# Altium PCB ART-Pi_STM32H750_COPY.PcbDoc (part 2 of 2)
Units mil, origin at the board's own origin, x right, y up, seen from the top; angles counter-clockwise.
Board outline 3346.46 x 2204.72 mil, 4 copper layers (Top Layer, VCC, GND, Bottom Layer), stack 30.634 mil thick; 187 components, 307 nets, 1023 pads, 107 vias.
Unrouted connection lines stored in the file: 478.
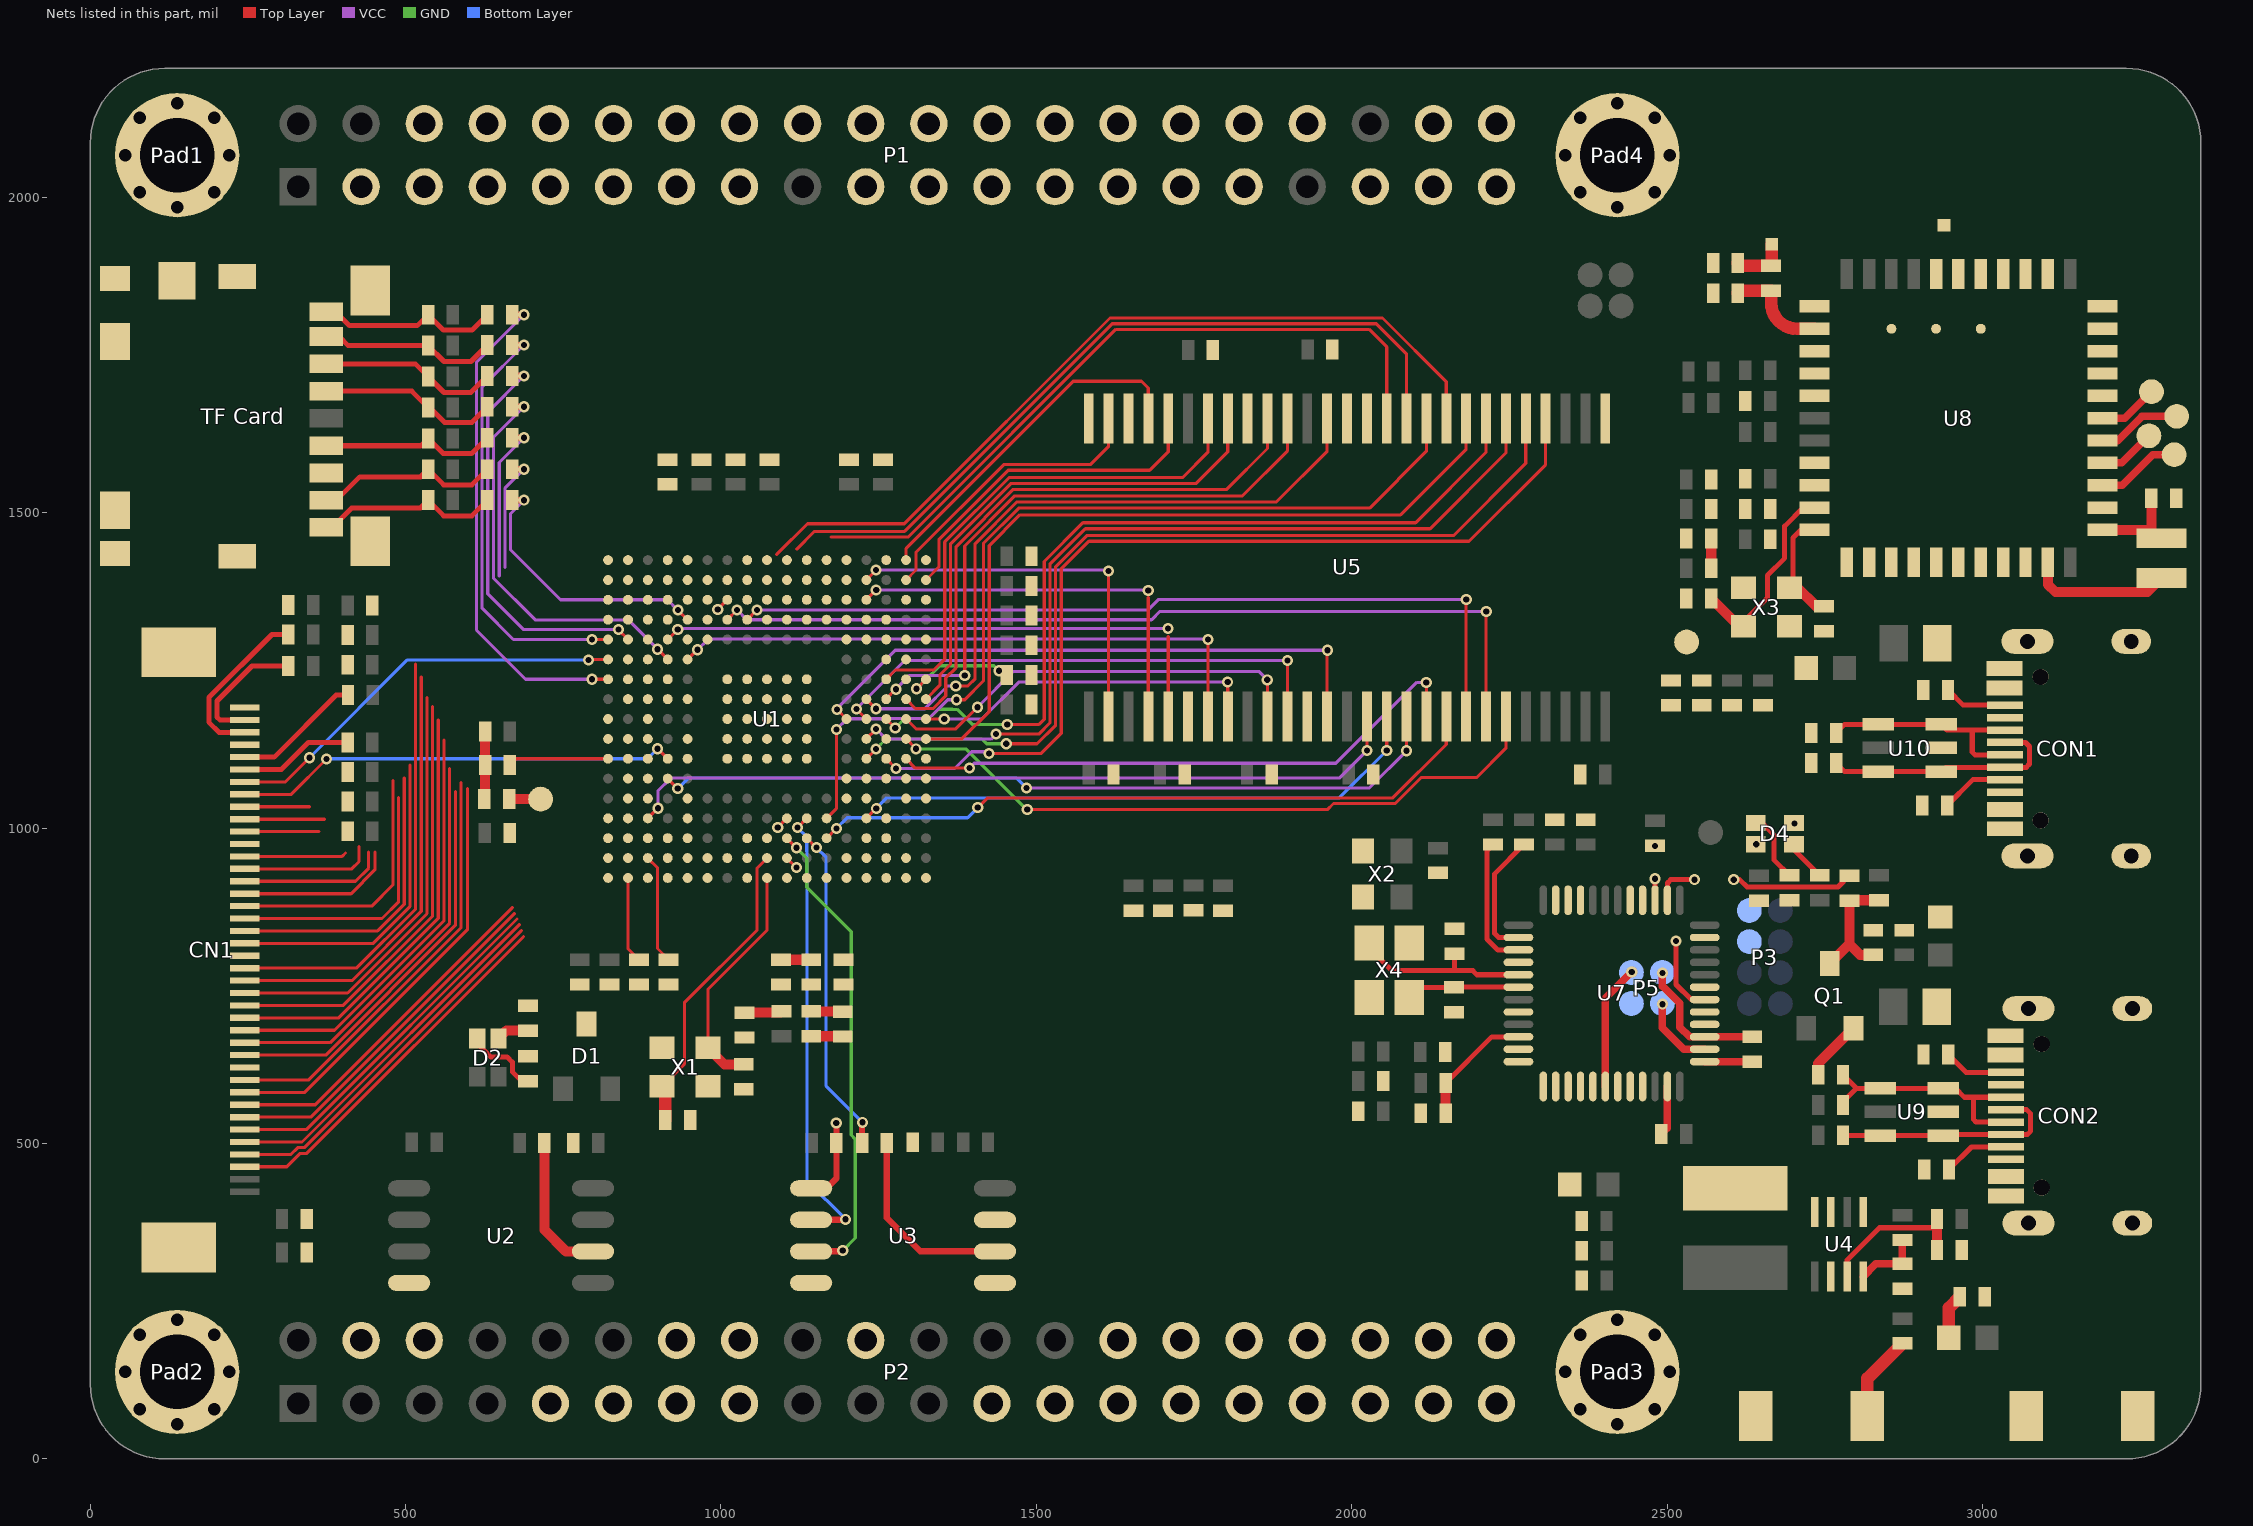
[diagram p4: the nets of this part, all layers, seen from the top]

## Via types
v1: diameter 17.72, hole 9.84, Top Layer to Bottom Layer, tented both sides, 107 vias

## Nets (pads, with @x,y where several pads share a name; then routed paths per layer and width w, separated by ;. In a path a pad name is that pad's centre, name@x,y a point inside that pad or via, vN(x,y) a via of type N, cw(c..) or ccw(c..) an arc to the next point about the centre after c; other vN are vias at no path point) (continued)
FMC_A6: U1.R7 U5.31 | length 1479.7
  Top Layer w5: U1.R7@1261.98,1110 v1(1277.4,1094.6) ; v1(1424.9,1118.1) 1507.21,1118.1 1539.5,1150.39 1539.5,1410.94 1583.36,1454.8 2186,1454.8 2307.45,1576.25 U5.31@2307.45,1649.44
  VCC w5: v1(1277.4,1094.6) 1370.7,1094.6 1397.26,1121.16 1421.84,1121.16 v1(1424.9,1118.1)
FMC_A7: U1.P7 U5.32 | length 1464.3
  Top Layer w5: U1.P7@1230.49,1110 1245.9,1125.41 v1(1245.9,1125.6) ; v1(1452.4,1133.7) 1501.08,1133.7 1530.5,1163.12 1530.5,1414.67 1579.63,1463.8 2161.4,1463.8 2275.95,1578.35 U5.32@2275.95,1649.44
  GND w5: v1(1245.9,1125.6) 1261.6,1141.3 1413.6,1141.3 1421.2,1133.7 v1(1452.4,1133.7)
FMC_A8: U1.P8 U5.33 | length 1417.2
  Top Layer w5: U1.P8@1230.49,1141.5 1245.9,1156.91 v1(1245.9,1157.2) ; v1(1436.1,1149.1) 1503.76,1149.1 1521.4,1166.74 1521.4,1418.3 1577.7,1474.6 2124.4,1474.6 2244.46,1594.66 U5.33@2244.46,1649.44
  VCC w5: v1(1245.9,1157.2) 1261.9,1141.2 1428.2,1141.2 v1(1436.1,1149.1)
FMC_A9: U1.R9 U5.34 | length 1360
  Top Layer w5: U1.R9@1261.98,1172.99 v1(1276.28,1158.7) v1@1276.48,1158.5 ; v1(1453.8,1164.5) 1504.3,1164.5 1512.4,1172.6 1512.4,1422.7 1573.8,1484.1 2101.4,1484.1 2212.96,1595.66 U5.34@2212.96,1649.44
  VCC w5: v1(1276.28,1158.7) v1@1277.53,1157.44
  GND w5: v1(1276.28,1158.7) 1291.48,1173.9 1330.4,1173.9 1344.85,1188.35 1367.03,1188.35 1367.14,1188.24 1374.36,1188.24 1398.1,1164.5 v1(1453.8,1164.5)
FMC_A10: U1.T8 U5.22 | length 1088.2
  Top Layer w5: U1.T8@1293.48,1141.5 v1(1309.3,1125.7) ; v1(1485.5,1029.3) 1961.34,1029.3 1971.04,1039 2069.03,1039 2110.33,1080.3 2198.2,1080.3 2244.46,1126.56 U5.22@2244.46,1177
  GND w5: v1(1309.3,1125.7) 1388.2,1125.7 1484.6,1029.3 v1(1485.5,1029.3)
FMC_A11: U1.U8 U5.35 | length 1249.7
  Top Layer w5: U1.U8@1324.98,1141.5 1381.9,1141.5 1425.2,1184.8 1425.2,1447.9 1473.9,1496.6 2077.6,1496.6 2181.47,1600.47 U5.35@2181.47,1649.44
FMC_A12: U1.H16 U5.36 | length 1316.9
  Top Layer w5: 1088.5,1434 1137.1,1482.6 1290.47,1482.6 1616.67,1808.8 2048.9,1808.8 2149.97,1707.73 U5.36@2149.97,1649.44
FMC_BA0: U1.H14 U5.20 | length 1339.1
  Top Layer w5: U1.H14@1041.51,1330.47 v1(1057.04,1346) ; U5.20@2181.47,1177 v1@2181.47,1362.6
  VCC w5: v1(1057.04,1346) 1677.2,1346 1693.8,1362.6 v1(2181.7,1362.6)
FMC_BA1: U1.G14 U5.21 | length 1388.2
  Top Layer w5: U1.G14@1010.02,1330.47 1010.02,1330.62 1025.3,1345.9 v1(1025.5,1345.9) ; U5.21@2212.96,1177 v1@2212.96,1343.6
  VCC w5: v1(1025.5,1345.9) 1041.1,1330.3 1682.7,1330.3 1696,1343.6 v1(2213.2,1343.6)
FMC_D0: U1.P16 U5.2 | length 624.4
  Top Layer w5: U1.P16@1230.49,1393.46 1230.49,1393.31 1245.6,1408.42 v1(1245.6,1409.2) ; U5.2@1614.54,1177 U5.2@1614.6,1177.06 1615.8,1178.26 1614.6,1179.46 v1(1614.6,1407.8)
  VCC w5: v1(1245.6,1409.2) 1614.4,1409.2 1614.6,1409 v1(1614.6,1407.8)
FMC_D1: U1.P15 U5.4 | length 642.8
  Top Layer w5: U1.P15@1230.49,1361.97 1230.49,1362.19 v1(1246,1377.7) ; U5.4@1677.53,1177 1677.53,1365.9
  VCC w5: v1(1246,1377.7) 1676.2,1377.7 v1(1677.3,1376.6)
FMC_D2: U1.D13 U5.5 | length 927
  Top Layer w5: U1.D13@915.53,1298.98 v1(931.5,1314.95) ; U5.5@1709.02,1177 1709.02,1303.6
  VCC w5: v1(931.5,1314.95) 933.15,1316.6 v1(1708.6,1316.6)
FMC_D3: U1.E12 U5.7 | length 960.6
  Top Layer w5: U1.E12@947.02,1267.48 962.34,1282.8 v1(962.8,1282.8) ; U5.7@1772.02,1177 v1(1772,1299)
  VCC w5: v1(962.8,1282.8) 979.7,1299.7 1771.3,1299.7 v1(1772,1299)
FMC_D4: U1.U9 U5.8 | length 559.2
  Top Layer w5: U1.U9@1324.98,1172.99 v1(1353.89,1172.99) ; U5.8@1803.51,1177 1803.51,1231.5 v1@1803.51,1233.6
  VCC w5: v1(1353.89,1172.99) 1413.49,1172.99 1472,1231.5 v1(1803.3,1231.5)
FMC_D5: U1.T9 U5.10 | length 680.6
  Top Layer w5: U1.T9@1293.48,1172.99 1309.17,1157.3 1372.3,1157.3 v1(1406.6,1191.6) ; U5.10@1866.5,1177 v1@1866.5,1235.1
  VCC w5: v1(1406.6,1191.6) 1463.5,1248.5 1852.8,1248.5 v1(1866.2,1235.1)
FMC_D6: U1.P9 U5.11 | length 827.4
  Top Layer w5: v1(1214.7,1188.8) U1.P9@1230.49,1172.99 U1.P9@1230.49,1174.11 ; U5.11@1898,1177 v1@1898,1265.7
  VCC w5: v1(1214.7,1188.8) 1291.6,1265.7 v1(1898.1,1265.7)
FMC_D7: U1.N9 U5.13 | length 943.5
  Top Layer w5: v1(1184.08,1187.9) U1.N9@1198.99,1172.99 ; U5.13@1960.99,1177 v1@1960.99,1282
  VCC w5: v1(1184.08,1187.9) 1184.08,1189.88 1276.2,1282 v1(1961.4,1282)
FMC_D8: U1.P10 U5.42 | length 1083.2
  Top Layer w5: U1.P10@1230.49,1204.49 v1(1245.6,1189.38) ; v1(1372.2,1225.4) 1391.42,1225.4 1402.9,1236.88 1402.9,1451.06 1468.84,1517 1880.4,1517 1960.99,1597.59 U5.42@1960.99,1649.44
  VCC w5: v1(1245.6,1189.38) 1323.08,1189.38 1359.1,1225.4 v1(1372.2,1225.4)
FMC_D9: U1.R10 U5.44 | length 971.3
  Top Layer w5: U1.R10@1261.98,1204.49 1261.98,1205.38 1276.7,1220.1 v1(1277.3,1220.1) ; v1(1386.4,1242.1) 1386.4,1447.29 1465.81,1526.7 1826.9,1526.7 1898,1597.8 U5.44@1898,1649.44
  VCC w5: v1(1277.3,1220.1) 1299.3,1242.1 v1(1386.4,1242.1)
FMC_D10: U1.T10 U5.45 | length 926.6
  Top Layer w5: U1.T10@1293.48,1204.49 1308.27,1189.7 1336.5,1189.7 1356.4,1209.6 1356.4,1238.2 1372.7,1254.5 1372.7,1446.32 1463.48,1537.1 1801.8,1537.1 1866.5,1601.8 U5.45@1866.5,1649.44
FMC_D11: U1.U10 U5.47 | length 815
  Top Layer w5: U1.U10@1324.98,1204.49 1347.1,1226.61 1347.1,1242.8 1363.7,1259.4 1363.7,1450.04 1460.16,1546.5 1753.53,1546.5 1803.51,1596.48 U5.47@1803.51,1649.44
FMC_D12: U1.R11 U5.48 | length 821.5
  Top Layer w5: U1.R11@1261.98,1235.98 1276.7,1250.7 1337.5,1250.7 1354.7,1267.9 1354.7,1453.77 1456.83,1555.9 1732,1555.9 1772.02,1595.92 U5.48@1772.02,1649.44
FMC_D13: U1.U16 U5.50 | length 546.3
  Top Layer w5: U1.U16@1324.98,1393.46 1345.5,1413.99 1345.5,1457.3 1455.5,1567.3 1679.6,1567.3 1709.02,1596.72 U5.50@1709.02,1649.44
FMC_D14: U1.T17 U5.51 | length 565.1
  Top Layer w5: U1.T17@1293.48,1424.96 1293.48,1443.48 1558.5,1708.5 1666.8,1708.5 1677.53,1697.77 U5.51@1677.53,1649.44
FMC_D15: U1.T16 U5.53 | length 469.4
  Top Layer w5: U1.T16@1293.48,1393.46 1309.2,1409.18 1309.2,1437.3 1448.2,1576.3 1585.6,1576.3 1614.54,1605.24 U5.53@1614.54,1649.44
FMC_NBL0: U1.C4 U5.15 | length 1254.8
  Top Layer w5: U1.C4@884.03,1015.51 v1(899.9,1031.4) ; v1(2024.05,1122.9) U5.15@2024.05,1177.06
  VCC w5: v1(899.9,1031.4) 899.9,1058.9 920.24,1079.24 1980.39,1079.24 v1(2024.05,1122.9)
FMC_NBL1: U1.B4 U5.39 | length 1142.3
  Top Layer w5: 1174.6,1461.5 1296.8,1461.5 1626.1,1790.8 2027.6,1790.8 2055.48,1762.92 U5.39@2055.48,1649.44
FMC_SDCKE0: U1.M4 U5.37 | length 1445.4
  Top Layer w5: U1.M4@1167.5,1015.51 1182.9,1030.92 v1(1182.9,1156.4) ; v1(1373.5,1203.6) 1386.4,1203.6 1416.2,1233.4 1416.2,1451.63 1471.87,1507.3 2028.4,1507.3 2118.47,1597.37 U5.37@2118.47,1649.44
  VCC w5: v1(1182.9,1156.4) 1199.94,1173.44 1269.3,1173.44 1269.91,1174.06 1329.86,1174.06 1359.4,1203.6 v1(1373.5,1203.6)
FMC_SDCLK: U1.F15 U5.38 | length 1237.1
  Top Layer w5: 1120.1,1442.4 1148.2,1470.5 1291.1,1470.5 1620.4,1799.8 2038.8,1799.8 2086.98,1751.62 U5.38@2086.98,1649.44
FMC_SDNCAS: U1.D6 U5.17 | length 1270.3
  Top Layer w5: U1.D6@915.53,1078.5 v1(931.43,1062.6) ; U5.17@2087.04,1177.06 2087.04,1122.76 v1(2087.1,1122.7)
  VCC w5: v1(1484.2,1063.8) 2028.2,1063.8 v1(2087.1,1122.7)
  Bottom Layer w5: v1(931.43,1062.6) 948.13,1079.3 948.19,1079.24 1468.76,1079.24 v1(1484.2,1063.8)
FMC_SDNE0: U1.M3 U5.19 | length 1088.4
  Top Layer w5: U1.M3@1167.5,984.02 1182.78,999.3 v1(1182.9,999.3) ; v1(1407.2,1032.5) 1422.7,1048 2065.3,1048 2149.97,1132.67 U5.19@2149.97,1177
  Bottom Layer w5: v1(1182.9,999.3) 1200,1016.4 1391.1,1016.4 v1(1407.2,1032.5)
FMC_SDNRAS: U1.T7 U5.18 | length 941.3
  Top Layer w5: U1.T7@1293.48,1110 1308.28,1095.2 v1(1394.1,1095.2) ; U5.18@2118.47,1177 v1@2118.47,1231.1
  VCC w5: v1(1394.1,1095.2) 1401.64,1102.74 1974.94,1102.74 2103.3,1231.1 v1(2118.3,1231.1)
FMC_SDNWE: U1.P4 U5.16 | length 923.5
  Top Layer w5: U1.P4@1230.49,1015.51 v1(1246.3,1031.32) ; v1(2055.48,1123.02) U5.16@2055.48,1177
  Bottom Layer w5: v1(1246.3,1031.32) 1262.88,1047.9 1980.36,1047.9 v1(2055.48,1123.02)
GND: "TF Card.6" "TF Card.10" "TF Card.11" "TF Card.12" "TF Card.13" "TF Card.14" "TF Card.15" "TF Card.16" "TF Card.17" "TF Card.18" C1.1 C2.1 C4.1 C5.1 C6.1 C7.1 C8.1 C9.1 C10.1 C11.1 C12.2 C13.1 C14.1 C15.1 C16.1 C17.1 C18.1 C19.1 C20.1 C21.1 C22.1 C23.1 C24.1 C25.1 C26.1 C27.1 C28.1 C29.1 C30.1 C31.1 C32.1 C33.1 C34.1 C35.1 C36.1 C37.1 C38.1 C39.1 C40.1 C41.1 C42.1 C43.1 C44.1 C45.2 C46.2 C48.2 C49.1 C50.2 C52.1 C53.1 C54.1 C55.1 C56.1 C57.1 C58.1 C59.1 C60.1 C68.2 C69.2 C70.2 C71.1 C72.1 C73.2 C74.1 C75.2 C77.1 C78.1 C79.1 CN1.11 CN1.20 CN1.29 CN1.A CN1.B CON1.0 CON1.A1 CON1.A12 CON1.B1 CON1.B12 CON2.0 CON2.A1 CON2.A12 CON2.B1 CON2.B12 K1.2 K2.2 P1.6 P1.9 P1.14 P1.20 P1.25 P1.30 P1.34 P1.39 P2.6 P2.9 P2.14 P2.20 P2.25 P2.30 P2.34 P2.39 P3.8 P5.4 R7.1 R12.2 R13.2 R16.2 R17.2 R19.1 R24.2 R28.2 R38.2 R43.2 R48.1 R63.1 RF1.0 U1.A1 U1.A17 U1.B2 U1.B6 U1.C10 U1.C13 U1.C16 U1.F2 U1.G7 U1.G8 U1.G9 U1.G10 U1.G11 U1.G16 U1.H7 U1.H8 U1.H9 U1.H10 U1.H11 U1.J3 U1.J7 U1.J8 U1.J9 U1.J10 U1.J11 U1.J16 U1.J17 U1.K7 U1.K8 U1.K9 U1.K10 U1.K11 U1.K15 U1.L7 U1.L8 U1.L9 U1.L10 U1.L11 U1.L15 U1.M15 U1.N1 U1.N16 U1.P1 U1.R4 U1.R8 U1.T12 U1.U1 U1.U17 U2.4 U3.4 U4.4 U4.6 U5.6 U5.12 U5.28 U5.41 U5.46 U5.52 U5.54 U7.8 U7.20 U7.23 U7.35 U7.47 U8.1 U8.3 U8.20 U8.31 U8.33 U8.36 U9.5 U10.5 X1.2 X1.4 X2.4 X3.2 X3.4 X4.2 X4.4 | length 237.1
  Top Layer w12: C77.1@2491,515 2500.58,524.58 U7.23@2500.58,590.36
  Top Layer w16: R19.1@624.63,1046 626,1047.37 C36.1@626,1100 C13.1@626,1153 ; C41.1@1143,670 1192.63,670 C42.1@1193,669.63
GPIO_CARD_DETECT: R80.2 U1.A11 | length 791
  Top Layer w5: v1(795.6,1236.1) 795.72,1235.98 U1.A11@821.04,1235.98
  Top Layer w10: R80.2@669,1814 v1(687.7,1814)
  VCC w5: v1(687.7,1814) 612.3,1738.6 612.3,1313.9 690.1,1236.1 v1(795.6,1236.1)
GPIO_LCD_BL: CN1.34 U1.A12 | length 656.5
  Top Layer w5: CN1.34@245,1073.22 309.22,1073.22 v1(347.5,1111.5) ; v1(789.7,1266.7) 790.48,1267.48 U1.A12@821.04,1267.48
  Bottom Layer w5: v1(347.5,1111.5) 502.7,1266.7 v1(789.7,1266.7)
GPIO_LED_B: R21.2 U1.E4
GPIO_LED_R: R22.2 U1.C1
GPIO_PA6: P2.23 U1.R3
GPIO_PA15: P1.11 U1.A14
GPIO_PB0: P2.38 U1.U5
GPIO_PB1: P2.37 U1.T5
GPIO_PB2: P2.40 U1.R6
GPIO_PC6: P1.22 U1.F14
GPIO_PC7: P1.18 U1.F13
GPIO_PD13: P1.27 U1.R17
GPIO_PE2: P2.32 U1.C3
GPIO_PE4: P2.29 U1.D2
GPIO_PE5: P2.31 U1.D1
GPIO_PE6: P2.33 U1.E5
GPIO_PG7: P1.26 U1.F16
GPIO_PH2: P2.35 U1.N2
GPIO_PH3: P2.36 U1.P2
GPIO_PH7: P1.29 U1.U13
GPIO_PH8: P1.28 U1.T13
GPIO_PH9: P1.31 U1.R13
GPIO_PH10: P1.32 U1.P13
GPIO_PH11: P1.15 U1.D16
GPIO_PH12: P1.16 U1.B17
GPIO_PH15: P1.13 U1.B16
GPIO_TS_IIC_INT: U1.C9
GPIO_TS_RST: U1.B12
GPIO_USER_KEY1: K2.1 R23.1 U1.P3 | length 138
  Top Layer w20: K2.1@2817.59,68 2817.59,127.59 R23.1@2873,183
GPIO_WIFI_HOST_WAKE: U1.D3 U8.13
GPIO_WIFI_REG_ON: U1.E3 U8.12
I2C1_SCL: U1.B5
I2C1_SDA: U1.C5
I2C4_SCL: P1.3 R85.2 U1.P14
I2C4_SDA: P1.5 R84.2 U1.R14
LCD_B0: CN1.21 U1.D11 | length 510.1
  Top Layer w5: CN1.21@245,817.32 448.56,817.32 506.8,875.55 506.8,1099.7
LCD_B1: CN1.22 U1.E10 | length 470.5
  Top Layer w5: CN1.22@245,837 455.52,837 497.8,879.28 497.8,1079.5
LCD_B2: CN1.23 U1.D10 | length 420.1
  Top Layer w5: CN1.23@245,856.69 462.48,856.69 488.8,883.01 488.8,1048.4
LCD_B3: CN1.24 U1.B10 | length 414
  Top Layer w5: CN1.24@245,876.37 446.27,876.37 479.8,909.9 479.8,1075.2
LCD_B4: CN1.25 U1.C8 | length 250.1
  Top Layer w5: CN1.25@245,896.06 413.56,896.06 451.2,933.7 451.2,962
LCD_B5: CN1.26 U1.B8 | length 230.4
  Top Layer w5: CN1.26@245,915.74 420.51,915.74 441.3,936.53 441.3,962
LCD_B6: CN1.27 U1.A8 | length 210
  Top Layer w5: CN1.27@245,935.43 414.63,935.43 426,946.8 426,971.1
LCD_B7: CN1.28 U1.C7 | length 161.8
  Top Layer w5: CN1.28@245,955.11 399.21,955.11 404.6,960.5
LCD_CLK: CN1.30 U1.H3 | length 117.3
  Top Layer w5: CN1.30@245,994.48 362.28,994.48
LCD_DE: CN1.33 U1.D7 | length 707
  Top Layer w5: CN1.33@245,1053.54 318.54,1053.54 v1(374.6,1109.6) ; v1(899.4,1125.8) 899.73,1125.8 U1.D7@915.53,1110
  Bottom Layer w5: v1(374.6,1109.6) 374.9,1109.9 883.5,1109.9 v1(899.4,1125.8)
LCD_G0: CN1.12 U1.N14 | length 631
  Top Layer w5: CN1.12@245,640.15 373.22,640.15 578.8,845.73 578.8,1057.8
LCD_G1: CN1.13 U1.N13 | length 648.5
  Top Layer w5: CN1.13@245,659.83 380.18,659.83 569.8,849.46 569.8,1094.6
LCD_G2: CN1.14 U1.M14 | length 673.9
  Top Layer w5: CN1.14@245,679.52 387.14,679.52 560.8,853.18 560.8,1139.3
LCD_G3: CN1.15 U1.L14 | length 686.2
  Top Layer w5: CN1.15@245,699.2 394.09,699.2 551.8,856.91 551.8,1171
LCD_G4: CN1.16 U1.K14 | length 688.2
  Top Layer w5: CN1.16@245,718.89 401.05,718.89 542.8,860.64 542.8,1192.37
LCD_G5: CN1.17 U1.J14 | length 683.2
  Top Layer w5: CN1.17@245,738.57 408.01,738.57 533.8,864.37 533.8,1206.7
LCD_G6: CN1.18 U1.J15 | length 696.9
  Top Layer w5: CN1.18@245,758.26 414.96,758.26 524.8,868.1 524.8,1239.7
LCD_G7: CN1.19 U1.H17 | length 698
  Top Layer w5: CN1.19@245,777.94 421.92,777.94 515.8,871.82 515.8,1260.1
LCD_HSYNC: CN1.31 U1.H1 | length 126.3
  Top Layer w5: CN1.31@245,1014.17 371.27,1014.17
LCD_R0: CN1.3 U1.P5 | length 593
  Top Layer w5: CN1.3@245,462.98 311.48,462.98 332.85,484.35 343.19,484.35 686.84,828
LCD_R1: CN1.4 U1.N6 | length 585.4
  Top Layer w5: CN1.4@245,482.67 318.17,482.67 328.85,493.35 339.47,493.35 683.51,837.4
LCD_R2: CN1.5 U1.P6 | length 577.9
  Top Layer w5: CN1.5@245,502.35 335.74,502.35 680.18,846.8
LCD_R3: CN1.6 U1.T6 | length 569.8
  Top Layer w5: CN1.6@245,522.04 342.7,522.04 676.56,855.9
LCD_R4: CN1.7 U1.U6 | length 561.7
  Top Layer w5: CN1.7@245,541.72 349.65,541.72 672.83,864.9
LCD_R5: CN1.8 U1.U7 | length 553.5
  Top Layer w5: CN1.8@245,561.41 356.61,561.41 669.1,873.9
LCD_R6: CN1.9 U1.R12 | length 683.2
  Top Layer w5: CN1.9@245,581.09 340.29,581.09 597.9,838.7 597.9,1062.3
LCD_R7: CN1.10 U1.N15 | length 673
  Top Layer w5: CN1.10@245,600.78 346.58,600.78 587.8,842 587.8,1072.3
LCD_VSYNC: CN1.32 U1.H2 | length 102.2
  Top Layer w5: CN1.32@245,1033.85 347.25,1033.85
LED_STLINK: D4.2 D4.4 U7.30 | length 124.4
  Top Layer w8: v1(2514.2,821.2) 2514.2,752.2 2538.24,728.16 U7.30@2559.64,728.16
  other v1: 2641.3,974.3 2702.1,1007.5
NetC12_1: C12.1 R5.1 U4.8 | length 108.3
  Top Layer w12: U4.8@2811,289 2831,309 C12.1@2873,309 R5.1@2873,347
NetC35_2: C35.2 D1.3 U1.B1 | length 136.9
  Top Layer w5: U1.B1@852.54,921.02 852.54,808.83 C35.2@870,791.37
NetC36_2: C36.2 U1.A7 | length 159.8
  Top Layer w5: C36.2@665.37,1100 675.37,1110 U1.A7@821.04,1110
NetC37_2: C37.2 U1.D17
NetC38_2: C38.2 U1.U11 | length 184.9
  Top Layer w5: v1(1310.2,1221.1) 1310.2,1221.21 U1.U11@1324.98,1235.98 ; v1(1440.6,1249.5) 1446.5,1249.5 C38.2@1453,1243
  GND w5: v1(1310.2,1221.1) 1346.56,1257.46 1432.64,1257.46 v1(1440.6,1249.5)
NetC45_1: C45.1 C61.2 U8.2 | length 237.1
  Top Layer w20: U8.2@2733.65,1791.73 2706.18,1791.73 ; C45.1@2616.37,1852 ccw(c2616.37,1848) C45.1@2612.37,1848 cw(c2616.37,1848) C45.1@2616.37,1852 ; C45.1@2616.37,1852 C61.2@2665,1852 2665,1832.92 ; 2665,1832.92 ccw(c2706.18,1832.92) 2706.18,1791.73 ; 2665,1832.92 ccw(c2706.18,1832.92) 2706.18,1791.73
NetC46_1: C46.1 C61.1 RF1.1 | length 99.3
  Top Layer w16: C61.1@2665,1891.37 ccw(c2665,1892.37) 2666,1892.37 cw(c2665,1892.37) C61.1@2665,1891.37
  Top Layer w20: C61.1@2665,1891.37 C46.1@2617,1891.37 ; C61.1@2666,1892.37 RF1.1@2666,1926 ; C46.1@2617,1891.37 cw(c2617,1896) C46.1@2612.37,1896 ccw(c2617,1896) C46.1@2617,1891.37
NetC48_1: C48.1 C68.1 R31.1 U8.9 | length 47
  Top Layer w16: R31.1@2570,1412 C48.1@2570,1459
NetC50_1: C50.1 U1.J1 X1.3 | length 375.7
  Top Layer w5: X1.3@979.42,651.5 979.42,744.42 1073.01,838.01 U1.J1@1073.01,921.02
  Top Layer w16: X1.3@979.42,651.5 1005.55,625.37 C50.1@1036,625.37
NetC52_2: C52.2 U1.J2 X1.1 | length 486.6
  Top Layer w5: X1.1@906.58,590.48 942,625.9 942,723 1057,838 1057,936.51 U1.J2@1073.01,952.52
  Top Layer w20: X1.1@906.58,590.48 911.63,585.43 C52.2@911.63,537
NetC53_2: C53.2 R18.2 U1.K1 | length 59.8
  Top Layer w16: C53.2@1037,707.37 1094,707.37 R18.2@1096,709.37
NetC69_1: C69.1 L2.2 U8.23 | length 127.8
  Top Layer w16: U8.23@3190.35,1472.83 3268,1472.83 C69.1@3268,1523
NetC71_2: C71.2 U7.5 X4.1 | length 289
  Top Layer w8: X4.1@2028.01,818 2028.01,809.99 2064,774 2163,774 ; C71.2@2163,801 2163,774 ; U7.5@2264.36,767.53 2198.47,767.53 2192,774 2163,774
NetC72_2: C72.2 U7.6 X4.3 | length 180.2
  Top Layer w8: X4.3@2091,731.39 2106.98,747.37 C72.2@2162,747.37 2162.47,747.84 U7.6@2264.36,747.84
NetC73_1: C73.1 U8.10 X3.1 | length 310.5
  Top Layer w8: X3.1@2614,1320 2658.9,1364.9 2658.9,1400.5 2686.4,1428 2686.4,1478.8 2715.87,1508.27 U8.10@2733.65,1508.27
  Top Layer w16: C73.1@2570,1364 X3.1@2614,1320
NetC75_1: C75.1 U8.11 X3.3 | length 187.9
  Top Layer w8: X3.3@2694.01,1381.02 2699.8,1386.81 2699.8,1460.3 2712.33,1472.83 U8.11@2733.65,1472.83
  Top Layer w16: X3.3@2694.01,1381.02 2706.98,1381.02 2736.43,1351.57 C75.1@2749,1351.57
NetCN1_37: CN1.37
NetCN1_40: CN1.40
NetCON1_A4: CON1.A4 CON1.A9 CON1.B4 CON1.B9 F1.1
NetCON1_A5: CON1.A5 R13.1 | length 108.4
  Top Layer w8: R13.1@2944,1036 2984.78,1076.78 CON1.A5@3035.53,1076.78
NetCON1_A6: CON1.A6 CON1.B6 R10.1 U10.1 U10.6 | length 365.4
  Top Layer w8: R10.1@2768,1151 2781.5,1164.5 U10.1@2835,1164.5 U10.6@2935,1164.5 2943.98,1155.52 2983.9,1155.52 ; CON1.A6@3035.53,1116.15 2988.15,1116.15 2983.9,1120.4 2983.9,1155.52 ; CON1.B6@3035.53,1155.52 2983.9,1155.52
NetCON1_A7: CON1.A7 CON1.B7 R11.1 U10.3 U10.4 | length 387
  Top Layer w8: R11.1@2768,1103 2781.5,1089.5 U10.3@2835,1089.5 U10.4@2935,1089.5 2941.97,1096.47 CON1.B7@3035.53,1096.47 3069.47,1096.47 3074.8,1101.8 3074.8,1129.4 3068.36,1135.84 CON1.A7@3035.53,1135.84
NetCON1_A8: CON1.A8
NetCON1_B5: CON1.B5 R12.1 | length 100.1
  Top Layer w8: R12.1@2945.37,1219 2969.48,1194.89 CON1.B5@3035.53,1194.89
NetCON1_B8: CON1.B8
NetCON2_A4: CON2.A4 CON2.A9 CON2.B4 CON2.B9 F2.1
NetCON2_A5: CON2.A5 R17.1 | length 105
  Top Layer w8: R17.1@2947,459 2982.57,494.57 CON2.A5@3037.23,494.57
NetCON2_A6: CON2.A6 CON2.B6 R14.1 R44.1 U9.1 U9.6 | length 396.9
  Top Layer w8: R14.1@2779,561 2779,566 2800.5,587.5 ; R44.1@2779,609 2800.5,587.5 ; CON2.A6@3037.23,533.94 2989.84,533.94 2985.59,538.19 2985.59,573.31 ; CON2.B6@3037.23,573.31 2985.59,573.31 ; 2800.5,587.5 U9.1@2838,587.5 U9.6@2938,587.5 2957.2,587.5 2971.39,573.31 2985.59,573.31
NetCON2_A7: CON2.A7 CON2.B7 R15.1 U9.3 U9.4 | length 370.2
  Top Layer w8: R15.1@2779,513 2779.5,512.5 U9.3@2838,512.5 U9.4@2938,512.5 2939.75,514.25 CON2.B7@3037.23,514.25 3071.16,514.25 3076.49,519.59 3076.49,547.19 3070.06,553.62 CON2.A7@3037.23,553.62
NetCON2_A8: CON2.A8
NetCON2_B5: CON2.B5 R16.1 | length 103
  Top Layer w8: R16.1@2946,641 2974.32,612.68 CON2.B5@3037.23,612.68
NetCON2_B8: CON2.B8
NetD2_2: D2.2 R22.1 | length 121.9
  Top Layer w8: D2.2@613.52,666.32 613.52,658.47 635,637 661,637 669.25,628.75 669.25,613.75 684.37,598.63 R22.1@694,598.63
NetD2_3: D2.3 R21.1 | length 52.3
  Top Layer w16: D2.3@646.99,666.29 659.7,679 R21.1@694,679
NetD3_2: D3.2 R24.1 | length 72.3
  Top Layer w20: D3.2@2946.69,192 2946.69,239.36 R24.1@2964.33,257
NetD4_1: D4.1 R49.1 | length 66.4
  Top Layer w8: D4.1@2701.31,974.52 2701.31,965.69 R49.1@2742,925
NetD4_3: D4.3 R48.2 | length 110.9
  Top Layer w8: D4.3@2640.71,1007.99 2650.71,1007.99 2669.8,988.9 2669.8,949.2 R48.2@2694,925
NetL1_1: L1.1 U4.3
NetL2_1: L2.1 U8.21 | length 229.9
  Top Layer w16: U8.21@3103.73,1421.65 3103.73,1386.27 3115.8,1374.2 3261.69,1374.2 L2.1@3284,1396.51
NetPad1_0: Pad1.0
NetPad2_0: Pad2.0
NetPad3_0: Pad3.0
NetPad4_0: Pad4.0
NetQ1_2: Q1.2 R44.2 | length 96.9
  Top Layer w16: R44.2@2739.63,609 2739.63,627.05 Q1.2@2795.4,682.82
NetQ1_3: Q1.3 R40.2 R42.1 R43.1 | length 205
  Top Layer w16: Q1.3@2758,785.18 2789,816.18 ; R43.1@2827,799 2806.18,799 2789,816.18 ; R40.2@2836,885.63 2789.63,885.63 R42.1@2789,885 2789,816.18
NetR3_1: R3.1 U2.6 | length 229.1
  Top Layer w16: R3.1@720,501 720,363 754,329 U2.6@797,329
NetR4_1: R4.1 U3.6 | length 312.3
  Top Layer w10: R4.1@1263,501 1263,382 1316,329 U3.6@1434.35,329
NetR6_1: R6.1 R7.2 U4.7 | length 238.2
  Top Layer w8: U4.7@2785.41,289 2785.41,315.01 2836.8,366.4 R6.1@2927.3,366.4
  Top Layer w16: R7.2@2928,331 R6.1@2928,380
NetR19_2: R19.2 T3.1 U1.E8 | length 50
  Top Layer w16: R19.2@664,1046 T3.1@714,1046
NetR20_2: R20.2 U1.E7
NetR27_1: R27.1 R28.1 U7.10 | length 193.6
  Top Layer w8: R27.1@2149,596 2222.1,669.1 U7.10@2264.36,669.1
  Top Layer w16: R28.1@2149,548 R27.1@2149,596
NetR32_2: R32.2 U7.39 | length 34
  Top Layer w8: U7.39@2480.9,885.64 v1(2480.9,919.6)
  other v1: 2480.9,971.7
NetR34_1: R34.1 U7.2 | length 200.7
  Top Layer w8: U7.2@2264.36,826.58 2232.92,826.58 2226.6,832.9 2226.6,927.6 R34.1@2273,974
NetR36_1: R36.1 U7.3 | length 210.8
  Top Layer w8: R36.1@2224,974 2214.6,964.6 2214.6,823.9 2231.6,806.9 U7.3@2264.36,806.9
NetR39_2: R39.2 U8.17
NetR41_1: R41.1 X2.3
NetR41_2: R41.2 U1.C2 | length 174.8
  Top Layer w5: U1.C2@884.03,952.52 899.3,937.25 899.3,809.07 R41.2@917,791.37
NetR57_2: R57.2 U8.24
NetR67_2: "TF Card.1" R67.2 R74.1 | length 283
  Top Layer w8: 373.82,1779.48 394.52,1779.48 409,1765 R67.2@535.63,1765 560.73,1739.9 603.53,1739.9 R74.1@629.63,1766
NetR68_2: "TF Card.2" R68.2 R75.1 | length 285.5
  Top Layer w8: 373.82,1736.17 515.46,1736.17 R68.2@535.63,1716 560.88,1690.75 603.38,1690.75 R75.1@629.63,1717
NetR69_2: "TF Card.3" R69.2 R76.1 | length 286.6
  Top Layer w8: 373.82,1692.87 509.76,1692.87 R69.2@535.63,1667 538.1,1667 561.85,1643.25 604.88,1643.25 R76.1@629.63,1668
NetR70_2: "TF Card.5" R70.2 R77.1 | length 280.9
  Top Layer w8: 373.82,1606.25 523.88,1606.25 R70.2@535.63,1618 559.53,1594.1 604.73,1594.1 R77.1@629.63,1619
NetR71_2: "TF Card.7" R71.2 R78.1 | length 296.7
  Top Layer w8: 373.82,1519.64 390.14,1519.64 427.4,1556.9 523.53,1556.9 R71.2@535.63,1569 560.33,1544.3 604.93,1544.3 R78.1@629.63,1569
NetR72_2: "TF Card.8" R72.2 R79.1 | length 294.1
  Top Layer w8: 373.82,1477.12 383.96,1477.12 414.34,1507.5 523.13,1507.5 R72.2@535.63,1520 560.43,1495.2 604.83,1495.2 R79.1@629.63,1520
NetR73_2: "TF Card.9" R73.2 R80.1 | length 292.4
  Top Layer w8: 373.82,1818.85 388.85,1818.85 411.1,1796.6 518.23,1796.6 R73.2@535.63,1814 560.03,1789.6 605.23,1789.6 R80.1@629.63,1814
NetT8_1: T8.1 U8.25 | length 133.7
  Top Layer w12: U8.25@3190.35,1543.7 3221.8,1543.7 3270.1,1592 T8.1@3304,1592
NetT9_1: T9.1 U8.26 | length 91.4
  Top Layer w12: U8.26@3190.35,1579.13 3221.13,1579.13 T9.1@3264,1622
NetT10_1: T10.1 U8.27 | length 133.6
  Top Layer w12: U8.27@3190.35,1614.57 3214.59,1614.57 3253.02,1653 T10.1@3308,1653
NetT11_1: T11.1 U8.28 | length 95.1
  Top Layer w12: U8.28@3190.35,1650 3226,1650 T11.1@3268,1692
NetU1_E1: U1.E1
NetU1_F1: U1.F1
NetU1_G2: U1.G2
NetU1_H15: U1.H15
NetU1_K16: U1.K16
NetU1_K17: U1.K17
NetU1_L16: U1.L16
NetU1_L17: U1.L17
NetU1_M16: U1.M16
NetU1_M17: U1.M17
NetU1_N17: U1.N17
NetU1_T11: U1.T11
NetU4_1: U4.1
NetU5_40: U5.40
NetU7_4: U7.4
NetU7_11: U7.11
NetU7_14: U7.14
NetU7_16: U7.16
NetU7_17: U7.17
NetU7_19: U7.19
NetU7_21: U7.21
NetU7_28: U7.28
NetU7_29: U7.29
NetU7_31: U7.31
NetU7_40: U7.40
NetU7_41: U7.41
NetU7_45: U7.45
NetU7_46: U7.46
NetU8_4: U8.4
NetU8_5: U8.5
NetU8_8: U8.8
NetU8_29: U8.29
NetU8_30: U8.30
NetU8_32: U8.32
NetU8_35: U8.35
NetU8_37: U8.37
NetU8_38: U8.38
NetU8_39: U8.39
NetU8_40: U8.40
NetU8_45: U8.45
NetU8_46: U8.46
NetU8_47: U8.47
NRST: K1.1 P5.3 U7.18 | length 198.9
  Top Layer w12: U7.18@2402.16,590.36 2402.16,730.06 v1(2444,771.9)
PA0_C: P2.15 U1.T1
PA1_C: P2.16 U1.T2
PC2_C: P2.11 U1.R1
PC3_C: P2.13 U1.R2
PCM_FS: P1.35 U1.B3
PCM_IN: P1.38 U1.A9
PCM_MCLK: P1.37 U1.A4
PCM_OUT: P1.40 U1.A2
PCM_SCLK: P1.12 U1.A3
QSPI_BK1_C\E\: R2.2 U1.G15 U3.1 | length 156.1
  Top Layer w5: v1(994.85,1346.8) U1.G15@1010.02,1361.97
  Top Layer w10: U3.1@1143,429 1167.6,429 1183,444.4 R2.2@1183,501 1183,532.1 v1(1182.6,532.5)
QSPI_BK1_D0: U1.K4 U3.5 | length 20.7
  Top Layer w5: v1(1089.89,1000.9) U1.K4@1104.5,1015.51
QSPI_BK1_D1: U1.L4 U3.2 | length 728.4
  Top Layer w5: v1(1121.3,1000.81) U1.L4@1136,1015.51 ; v1@1196.9,379 v1(1197.6,379.7)
  Top Layer w10: U3.2@1143,379 v1@1196.9,379
  Bottom Layer w5: v1(1121.3,1000.81) 1135.84,986.27 1135.84,962.74 1136.2,962.38 1136.2,441.1 v1(1197.6,379.7)
QSPI_BK1_D2: U1.K3 U3.3 | length 757.6
  Top Layer w5: U1.K3@1104.5,984.02 v1(1119.52,969) ; v1@1191.9,329 v1(1193.1,330.2)
  Top Layer w10: U3.3@1143,329 v1@1191.9,329
  GND w5: v1(1119.52,969) 1136,952.52 1136,906.2 1206.4,835.8 1206.4,513.4 1212.96,506.84 1212.96,350.06 v1(1193.1,330.2)
QSPI_BK1_D3: U1.K2 U3.7 | length 21.2
  Top Layer w5: U1.K2@1104.5,952.52 v1(1119.5,937.52)
QSPI_CLK: R4.2 U1.L3 | length 519.7
  Top Layer w5: U1.L3@1136,984.02 1136.28,984.02 v1(1151.2,969.1)
  Top Layer w10: R4.2@1223.63,501 v1@1223.63,533.5
  Bottom Layer w5: v1(1151.2,969.1) 1166.7,953.6 1166.7,591 v1(1224.2,533.5)
RCC_MCO_1: P1.7 U1.E15
RPI_SPI_MISO: P1.21 U1.B15
RPI_SPI_MOSI: P1.19 U1.C14
RPI_SPI_NSS: P1.24 U1.A16
RPI_SPI_SCK: P1.23 U1.A15
RPI_UART_RXD: P1.10 U1.D14
RPI_UART_TXD: P1.8 U1.D15
SD_CLK: R77.2 U1.C12 | length 254.2
  Top Layer w10: R77.2@669,1619 v1(687.7,1619)
  VCC w5: 648.3,1399.83 648.3,1579.6 v1(687.7,1619)
SD_CMD: R76.2 U1.D12 | length 640.2
  Top Layer w5: v1(899.5,1283.6) 915.53,1267.57 U1.D12@915.53,1267.48
  Top Layer w10: R76.2@669,1668 v1(687.7,1668)
  VCC w5: v1(687.7,1668) 639.3,1619.6 639.3,1396.1 705.3,1330.1 853,1330.1 v1(899.5,1283.6)
SD_DAT0: R78.2 U1.E13 | length 187
  Top Layer w10: R78.2@669,1569 v1(687.7,1569)
  VCC w5: 657.3,1413.3 657.3,1538.6 v1(687.7,1569)
SD_DAT1: R79.2 U1.E14 | length 432.8
  Top Layer w5: v1(931.6,1345.7) 946.83,1330.47 U1.E14@947.02,1330.47
  Top Layer w10: R79.2@669,1520 v1(687.7,1520)
  VCC w5: v1(687.7,1520) 666.3,1498.6 666.3,1441.4 745.5,1362.2 915.1,1362.2 v1(931.6,1345.7)
SD_DAT2: R74.2 U1.A13 | length 684
  Top Layer w5: v1(795.6,1299) U1.A13@821.04,1298.98
  Top Layer w10: R74.2@669,1766 v1(687.7,1766)
  VCC w5: v1(687.7,1766) 621.3,1699.6 621.3,1348.5 670.8,1299 v1(795.6,1299)
SD_DAT3: R75.2 U1.B13 | length 640.6
  Top Layer w5: v1(837.3,1314.7) 852.54,1299.46 U1.B13@852.54,1298.98
  Top Layer w10: R75.2@669,1717 v1(687.7,1717)
  VCC w5: v1(687.7,1717) 630.3,1659.6 630.3,1371.4 687,1314.7 v1(837.3,1314.7)
SDMMC2_CK: R39.1 U1.B11
SDMMC2_CMD: R30.2 U1.C11 U8.16
SDMMC2_D0: R8.2 U1.U15 U8.18
SDMMC2_D1: R25.2 U1.T15 U8.19
SDMMC2_D2: R26.2 U1.C6 U8.14
SDMMC2_D3: R29.2 U1.B7 U8.15
SWCLK: U1.B14
SWDIO: U1.C15
T_JTCK: P5.1 U7.15 U7.26 | length 118.6
  Top Layer w12: v1(2492.7,720.9) 2492.7,683.3 2526.58,649.42 U7.26@2559.64,649.42
T_JTMS: P5.2 R33.2 U7.27 | length 218.3
  Top Layer w12: v1(2492.7,770.2) 2492.7,749.7 2520.2,722.2 2520.2,684.6 2535.7,669.1 U7.27@2559.64,669.1 2634.9,669.1 R33.2@2635,669
T_SWDIO_IN: R33.1 U7.25 | length 75.4
  Top Layer w12: U7.25@2559.64,629.73 2634.9,629.73 R33.1@2635,629.63
T_UART_RX: U7.13
T_UART_TX: U7.12
TSI_IIC_INT: CN1.39 R83.2 | length 207.4
  Top Layer w8: CN1.39@245,1171.65 205.35,1171.65 201,1176 201,1201.62 256.38,1257 R83.2@314,1257
TSI_IIC_SCK: CN1.38 R82.2 | length 270.1
  Top Layer w8: CN1.38@245,1151.96 204.04,1151.96 188,1168 188,1207 288,1307 R82.2@314,1307
TSI_IIC_SDA: CN1.36 R81.2 | length 204.4
  Top Layer w8: CN1.36@245,1112.59 291.59,1112.59 390,1211 R81.2@408.63,1211
TSI_RST: CN1.35 R51.2 | length 180.9
  Top Layer w8: CN1.35@245,1092.91 302.91,1092.91 346,1136 R51.2@408,1136
UART4_RX: U1.E2
USART4_TX: U1.N5
USB_OTG_FS1_N: P2.28 R11.2 U1.E17
USB_OTG_FS1_P: P2.27 R10.2 U1.E16
USB_RENUMn: R42.2 U7.38 | length 268
  Top Layer w8: U7.38@2500.58,885.64 2500.58,913.08 2505.8,918.3 v1(2543.4,918.3) ; v1(2605.7,918.3) 2615.16,918.3 2626.94,906.52 2771.15,906.52 R42.2@2789,924.37
VCC: P3.7
VDDA: C39.2 C40.2 FB1.2 R9.2 U1.L1 | length 48
  Top Layer w16: C40.2@1095,791.37 C39.2@1143,791.37
VREF+: C41.2 C42.2 P2.4 R9.1 U1.M1 | length 50.2
  Top Layer w16: C41.2@1143,709.37 1192.63,709.37 C42.2@1193,709
WL_32K: R57.1 T17.1

## Other copper
Top Layer:
  region net +3V3: 2394.5,345.3 2740,345.3 2740,267.6 2394.5,267.6
  region net NetCON1_A4: 3006.7,1234.2 3063.6,1234.2 3109.4,1188.4 3109.4,1063.5 3063.9,1018 3007,1018.1 3007,1041.2 3064.1,1041.4 3091,1068.3 3091,1183.2 3063.4,1210.8 3006.6,1210.8
  region net NetCON1_A4: 2905.3,1322.1 2979.8,1322.1 2996.3,1305.6 2996.3,1244.6 3006.7,1234.2 3063.6,1234.2 3063.6,1211 2975.8,1210.8 2966.3,1220.3 2966.3,1264.2 2905.5,1264.2
  region net NetCON2_A4: 2904.19,746.1 2975.28,746.1 2997.99,723.39 2997.99,662.39 3008.39,651.99 3065.29,651.99 3065.29,628.79 2977.49,628.59 2967.99,638.09 2967.99,688.2 2904.39,688.2
  region net NetCON2_A4: 3008.39,651.99 3065.29,651.99 3111.09,606.19 3111.09,481.29 3065.59,435.79 3008.69,435.89 3008.69,458.99 3065.79,459.19 3092.69,486.09 3092.69,600.99 3065.09,628.59 3008.29,628.59
  region net NetL1_1: 2765.4,367.7 2765.48,438.62 2739.7,464.4 2525.4,464.4 2525.4,422.3 2746.9,422.3 2753.6,415.6 2753.6,367.7
  region net +5V_USB: 221.3,448.4 268.3,448.4 313.7,403 313.7,311.6 263,311.7 263,376.9 221.4,418.5
VCC:
  region net +5V_USB: 2882.7,1321.8 2779.5,1321.8 2779.5,414.9 2779.5,367.7 2888.7,367.7 2888.7,1321.8

## Silkscreen, mask and mechanical layers (free items; w line width, h text height)
Top Solder:
  rectangle: 2420,1935 3345,2205
Mechanical 1:
  the board outline again, w5

## Text inside footprints (layer, text, board x,y; h text height)
CN1: Top Overlay "40" at 308,1167.61 h30 r90; Top Overlay "1" at 304,419.61 h30 r90
CON1: Top Overlay "USB" at 3181,1056 h50 r90
CON2: Top Overlay "USB" at 3182.69,473.79 h50 r90
P1: Top Overlay "1" at 258,1981 h30; Top Overlay "2" at 249,2131 h30; Top Overlay "39" at 2284,1976 h30; Top Overlay "40" at 2287,2133 h30
P2: Top Overlay "1" at 254,53 h30; Top Overlay "2" at 251,193 h30; Top Overlay "39" at 2286,49 h30; Top Overlay "40" at 2288,200 h30